# Altium PCB PCB2.PcbDoc
Units mil, origin at the board's own origin, x right, y up, seen from the top; angles counter-clockwise.
Board outline 3310 x 2450 mil, 2 copper layers (Top Layer, Bottom Layer); 28 components, 27 nets, 104 pads, 10 vias.
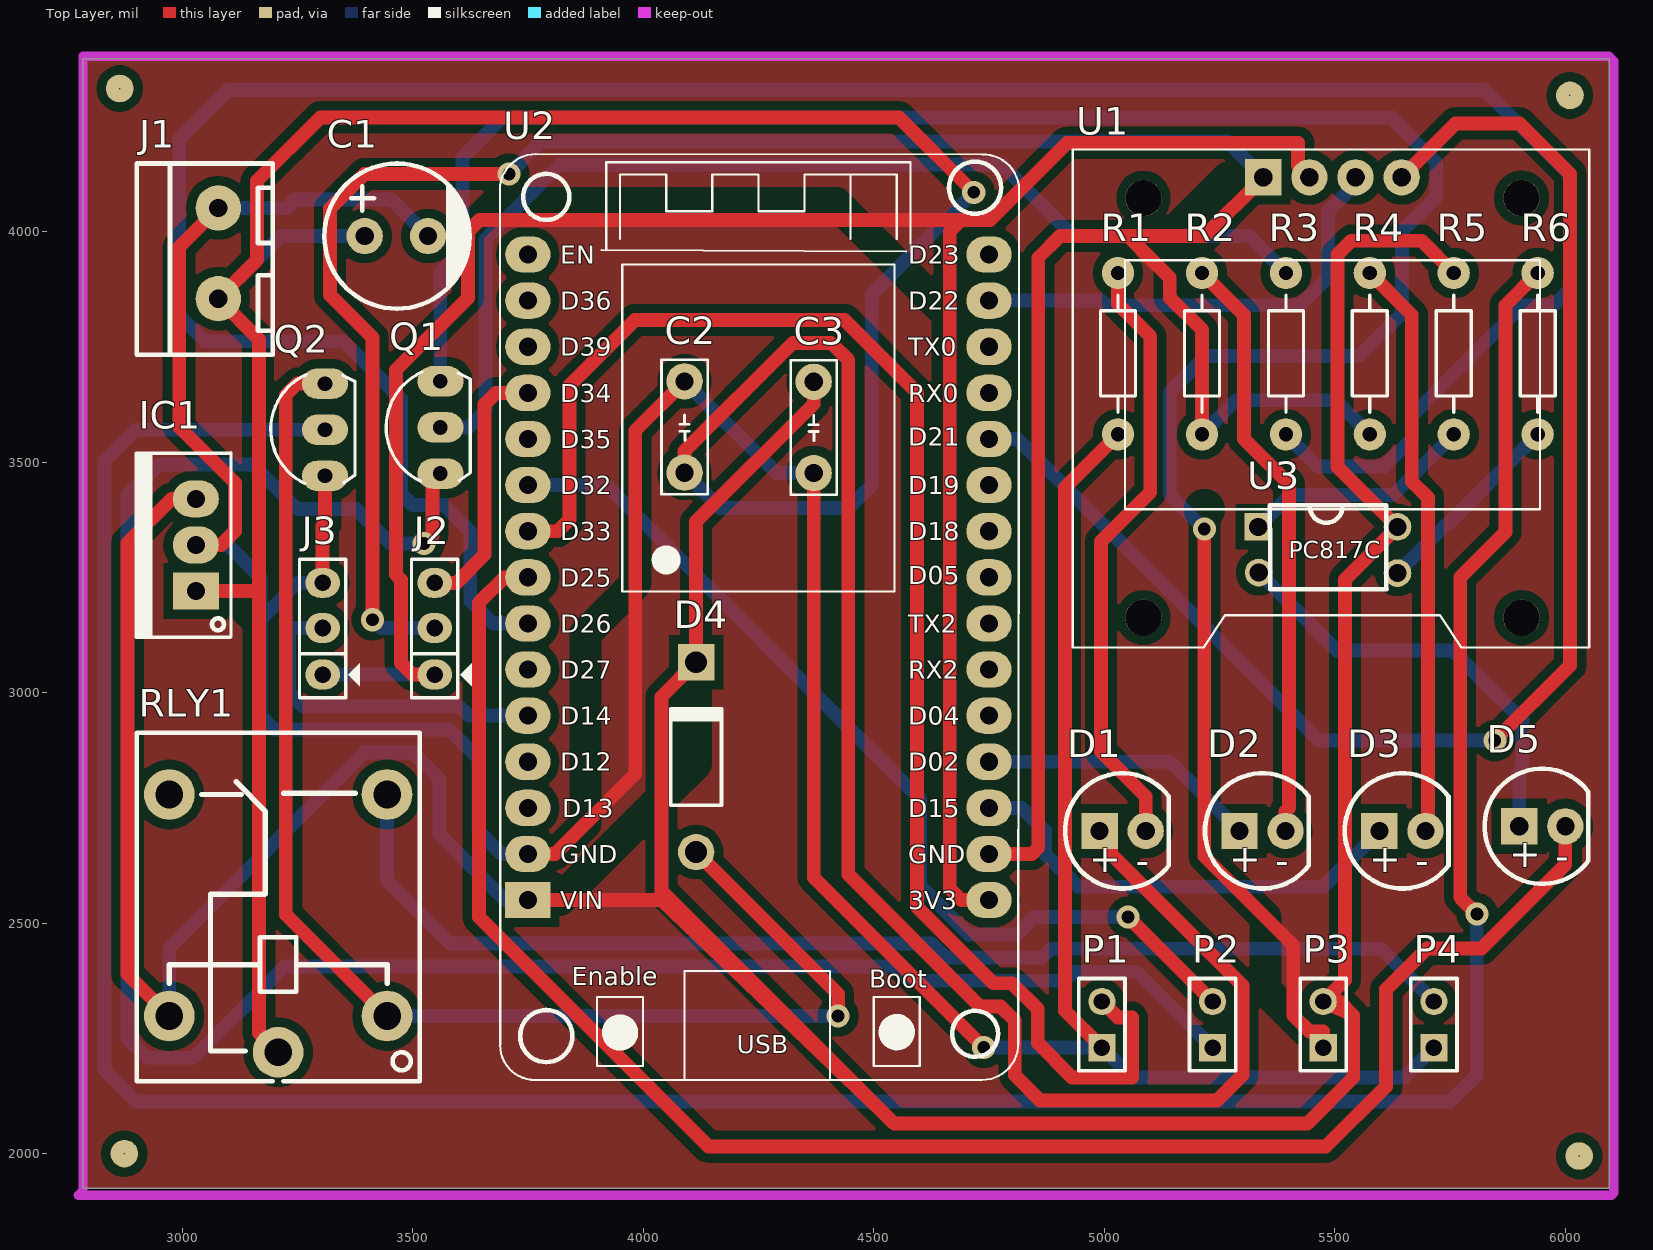
[diagram p0: Top Layer view]
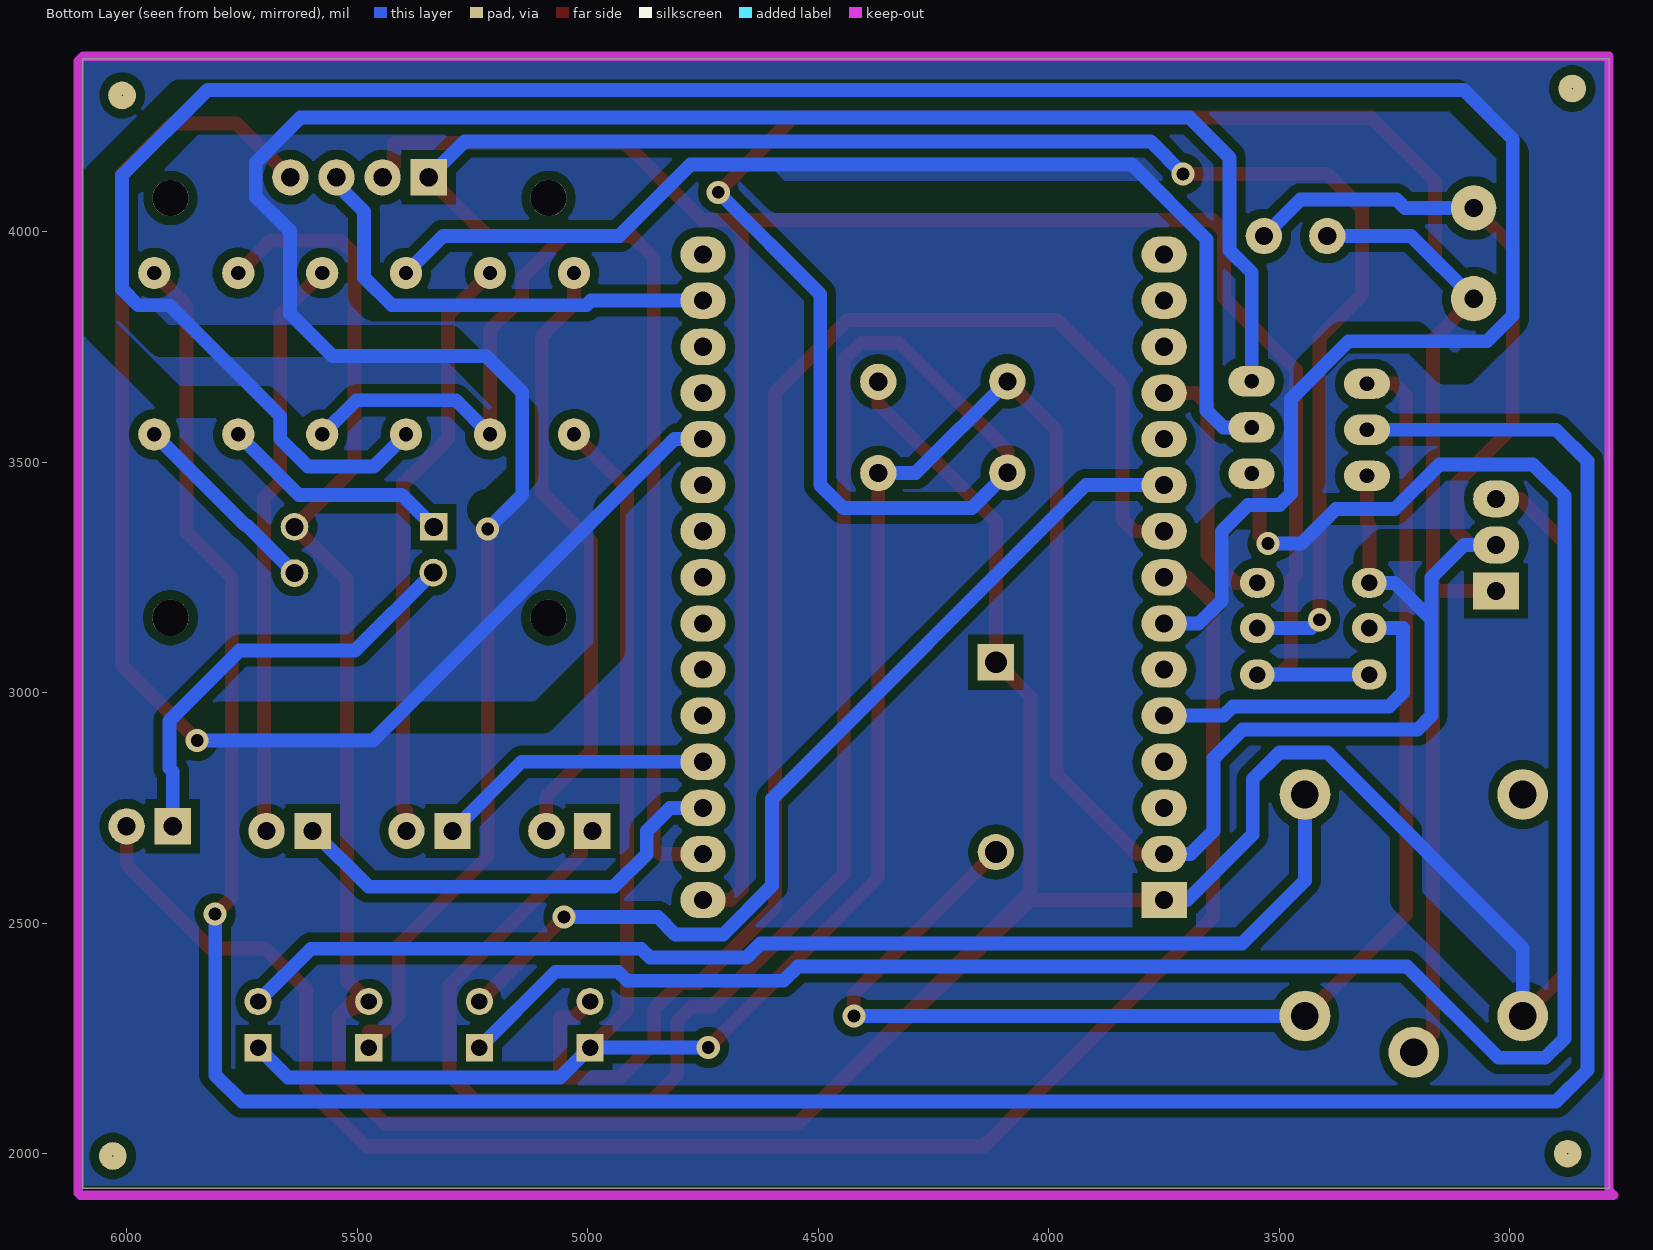
[diagram p1: Bottom Layer view, seen from below]
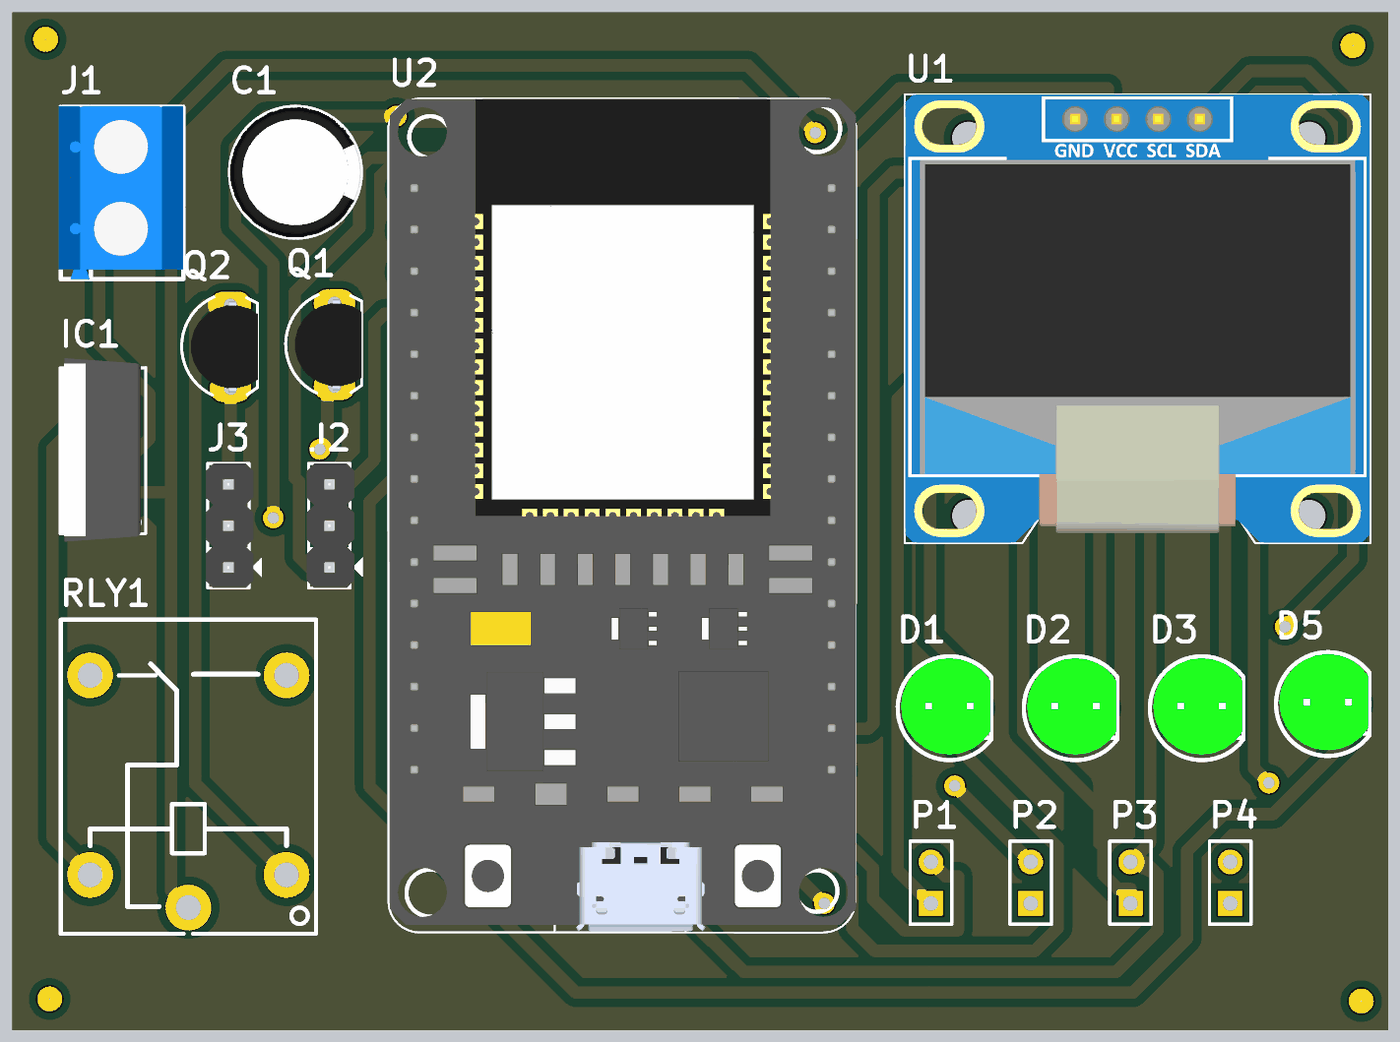
[diagram p2: 3D render of the assembled board from above, using the file's embedded part models]

## Layer stack, top to bottom
Top Solder: solder mask 0.4, Solder Resist, Dk 3.5
Top Layer: signal copper 1.4
Dielectric 1: dielectric 12.6, FR-4, Dk 4.8
Bottom Layer: signal copper 1.4
Bottom Solder: solder mask 0.4, Solder Resist, Dk 3.5

## Board outline
2785,1925 6095,1925 6095,4375 2785,4375

## Design rules (kind name [scope] priority, off if disabled: settings)
Clearance [All] p1: gap=20 ignorepadtopadclearanceinfootprint=FALSE
PolygonConnect [All] p1: connectstyle=Relief reliefconductorwidth=10 reliefentries=4 polygonreliefangle="90 Angle" airgapwidth=10
RoutingVias [All] p1: holewidth=28 width=50 viastyle="Through Hole" minholewidth=28 minwidth=50 maxholewidth=28 maxwidth=50
SolderMaskExpansion [All] p1: expansion=4 istentingtop=FALSE
Width [All] p1: maxlimit=40 minlimit=20 preferedwidth=30
30 further rules are at their usual default settings.

## Components (designator, comment, footprint, x,y, rotation, side; value= is the part's Value field where it differs from the comment)
C1 "100uF/50V" 100uF/50V 3465,3990.03 r0 top
C2 "CAPACITOR 103" "CAPACITOR 103" 4090,3575.95 r0 top
C3 "CAPACITOR 103" "CAPACITOR 103" 4370,3575 r0 top
D1 "LED_5mm_GREEN" LED_5mm_GREEN 5040,2700 r0 top
D2 "LED_5mm_GREEN" LED_5mm_GREEN 5343.33,2700 r0 top
D3 "LED_5mm_GREEN" LED_5mm_GREEN 5646.67,2700 r0 top
D4 "Diode 1N4007" DO-41 4115,2860 r90 top
D5 "LED_5mm_GREEN" LED_5mm_GREEN 5950,2710 r0 top
IC1 "LM7805" QTO-220 3030,3220 r90 top
J1 "Nguồn" BORNE-5.00-2P 3049,3940 r0 top
J2 "Cbdat" JP3 3547.78,3139 r90 top value=J3
J3 "DHT11" JP3 3305,3139 r90 top value=J3
P1 "nut 2" HDR1X2 4995,2230 r90 top
P2 "nut 1" HDR1X2 5235,2230 r90 top
P3 "Còi" HDR1X2 5475,2230 r90 top
P4 "Bơm" HDR1X2 5715,2230 r90 top
Q1 "BC547" QTO-92 3560.28,3575 r90 top value=C9014
Q2 "BC547" QTO-92 3310,3570 r90 top value=C9014
R1 "Res1" R1/4W 5030,3560 r90 top value=1K
R2 "Res1" R1/4W 5212,3560 r90 top value=1K
R3 "Res1" R1/4W 5394,3560 r90 top value=1K
R4 "Res1" R1/4W 5576,3560 r90 top value=1K
R5 "Res1" R1/4W 5758,3560 r90 top value=1K
R6 "Res1" R1/4W 5940,3560 r90 top value=1K
RLY1 "SRD-05VDC-SL-C" RELAY-TH_SRD-XXVDC-XL-C 3208.59,2535 r90 top
U1 "DISPLAY_OLED" DISPLAY_OLED 5495,3640 r0 top
U2 "ESP32_30" ESP32_30 4250,3250 r0 top
U3 "PC817C_DIP-4" PC817C_DIP-4 5485,3315 r0 top

## Footprints (in the part's own frame and the unit in brackets; to place one, negate y for a bottom-side part, rotate by r counter-clockwise, add the part's x,y. Pads: shape width x height; smd on the part's side, far side on the other; paste and mask are expansions set on the pad)
100uF/50V [mm] "ELECTROLYTIC CAPACITOR 8mm"
  round 2 hole 1 paste+0 mask+0.1: 1(1.745,0) 2(-1.745,0)
  silkscreen extent -3.97,-4 4.03,4, body extent -3.97,-4 4.03,4, height 12
BORNE-5.00-2P [mm]
  round 2.5 hole 1: 1(0.754,2.821) 2(0.754,-2.18)
  silkscreen extent -3.75,-5.27 3.75,5.27, body extent -3.86,-5.28 3.74,5.32, height 10.1
"CAPACITOR 103" [mm]
  round 2 hole 1: 1(0,-2.516) 2(0,2.516)
  silkscreen extent -1.27,-3.71 1.27,3.71, body extent -1.2,-2.93 1.25,2.72, height 5.3
DISPLAY_OLED [mm]
  rect 2x2 hole 1: 1(-3.81,12.128)
  round 2 hole 1: 2(-1.27,12.128) 3(1.27,12.128) 4(3.81,12.128)
  round 2 hole 2 unplated: ""(-10.414,-12.128) ""(-10.414,10.986) ""(10.414,-12.128) ""(10.414,10.986)
  silkscreen extent -14.3,-13.78 14.15,13.66, body extent -14.28,-13.76 14.12,13.64, height 5.7
DO-41 [mm] "Diode, Axial; Body 5.2 x 2.7 mm (LxDia. max), Lead Dia. 0.86 mm (max)"
  round 2 hole 1.2: 1(-5.23,0)
  rect 2x2 hole 1.2: 2(5.23,0)
  silkscreen extent -2.65,-1.4 2.75,1.4
ESP32_30 [mm] "Microcontoller Board 30 Pins Wifi 2.4GHz BLE 4.2 ESP32-WROOM-32D"
  oval 2.5x2 hole 1: 1(-12.7,17.78) 2(-12.7,15.24) 3(-12.7,12.7) 4(-12.7,10.16) 5(-12.7,7.62) 6(-12.7,5.08) 7(-12.7,2.54) 8(-12.7,0) 9(-12.7,-2.54) 10(-12.7,-5.08) 11(-12.7,-7.62) 12(-12.7,-10.16) 13(-12.7,-12.7) 14(-12.7,-15.24) 16(12.7,17.78) 17(12.7,15.24) 18(12.7,12.7) 19(12.7,10.16) 20(12.7,7.62) 21(12.7,5.08) 22(12.7,2.54) 23(12.7,0) 24(12.7,-2.54) 25(12.7,-5.08) 26(12.7,-7.62) 27(12.7,-10.16) 28(12.7,-12.7) 29(12.7,-15.24) 30(12.7,-17.78)
  rect 2.5x2 hole 1: 15(-12.7,-17.78)
  silkscreen extent -14.23,-27.69 14.35,23.31, body extent -14.15,-27.61 14.35,23.29, height 7
HDR1X2 [mm] "Connector; Header; 2 Position"
  rect 1.5x1.5 hole 0.9: 1(0,0)
  round 1.5 hole 0.9: 2(2.54,0)
  silkscreen extent -1.27,-1.27 3.81,1.27
JP3 [mil] "Jumper 3"
  oval 65x75 hole 36: 1(-100,0) 2(1,0) 3(99,0)
  silkscreen extent -150,-81 150,50, body extent -150,-60 150,55, height 355
LED_5mm_GREEN [mm]
  rect 2x2 hole 1: 1(-1.27,0)
  round 2 hole 1: 2(1.27,0)
  silkscreen extent -3.17,-3.17 2.54,3.17, body extent -2.97,-2.83 2.48,3.07, height 8.65
PC817C_DIP-4 [mil]
  rect 60x60 hole 39.37 paste+0 mask+4: 1(-151.04,44.42)
  round 60 hole 39.37 paste+0 mask+4: 2(-149.86,-54.7) 3(151.04,-55.88) 4(151.04,44.42)
  silkscreen extent -126,-91 127,91
QTO-92 [mil] "TO-92"
  oval 66x100 hole 32: 1(-100,0) 2(0,0) 3(100,0)
  silkscreen extent -117,-65 120,118, body extent -109,-66 109,95, height 245
QTO-220 [mil] "TO-220 - 1-2-3"
  rect 80x100 hole 39: 1(0,0)
  oval 80x100 hole 39: 2(100,0) 3(200,0)
  silkscreen extent -100,-76 300,130, body extent -119,-64 322,121, height 755
R1/4W [mil] "R 1/4W, 2 Pin, 350mil"
  round 70 hole 31: 1(0,0) 2(350,0)
  silkscreen extent 48,-38 302,38, body extent -40,-47 386,47, height 111
RELAY-TH_SRD-XXVDC-XL-C [mil]
  round 110 hole 60 paste+0 mask+2: 1(-236.26,-236.22) 2(244.05,-236.2) 3(244.06,236.2) 4(-236.26,236.22) 5(-315,0)
  silkscreen extent -378,-307 378,307

## Part data
C1: "Electrolytic Capacitor 100uF/50V"
C2 C3: "Ceramic Capacitor 103, 5mm."
D1 D2 D3 D5: "LED PTH 5mm Green."
D4: "1 Amp General Purpose Rectifier", Code_JEDEC=DO-204-AL, ComponentLink1Description="Manufacturer Link", ComponentLink1URL=http://www.fairchildsemi.com/, ComponentLink2Description=Datasheet, ComponentLink2URL=http://www.fairchildsemi.com/ds/1N%2F1N4001.pdf, DatasheetVersion=1998, LatestRevisionDate=17-Jul-2002, LatestRevisionNote="Re-released for DXP Platform.", PackageDescription="Diode, Axial; Body 5.2 x 2.7 mm (LxDia. max), Lead Dia. 0.86 mm (max)", PackageReference=DO-41, PackageVersion=Aug-1999, Published=8-Jun-2000, Publisher="Altium Limited"
IC1: library part LM78xx, "On ap +, from + 5 to + 24VDC"
J1: library part BORNE-5.00-2P, "Borne 2 Vias, Pitch 5mm.", JLCPCB PN=C91153
J2 J3: library part JP3, "Jumper 3"
P1 P2 P3 P4: library part "Header 2", "Header, 2-Pin", LatestRevisionDate=17-Jul-2002, LatestRevisionNote="Re-released for DXP Platform.", Publisher="Altium Limited"
Q1 Q2: library part NPN_EBC, "P 600mW, EBC"
R1 R2 R3 R4 R5 R6: library part Res1_4, "Resistor", Manufacturer="Generic Components", Class=Passive, Published=08/06/2000, Publisher="Altium Hobart Technology Centre", SubClass=Resistor
U1: "Display Oled 128x64 0.96\" I2C."
U2: "Microcontoller Board 30 Pins Wifi 2.4GHz BLE 4.2 ESP32-WROOM-32D", ComponentLink1Description=Datasheet, ComponentLink1URL=https://www.mouser.com/datasheet/2/891/esp32_wroom_32d_esp32_wroom_32u_datasheet_en-1365844.pdf

## Free pads (board coordinates)
  round 60 hole 3.2: 10(2865,4310) 11(6010,4295) 12(6030,1995) 13(2875,2000)

## Via types
v1: diameter 50, hole 28, Top Layer to Bottom Layer, 10 vias

## Nets (pads, with @x,y where several pads share a name; then routed paths per layer and width w, separated by ;. In a path a pad name is that pad's centre, name@x,y a point inside that pad or via, vN(x,y) a via of type N, cw(c..) or ccw(c..) an arc to the next point about the centre after c; other vN are vias at no path point)
5V: C3.2 D4.2 IC1.3 P3.2 R5.2 RLY1.4 U2.15 U3.4 | length 8853.1
  Top Layer w30: RLY1.4 2882,2389.11 2882,3325 2977,3420 IC1.3 ; U2.15 4040,2550 4544.53,2065.47 ; C3.2 4370,3626 4115,3371 D4.2 4040,2990.91 4040,2570 4544.53,2065.47 ; R5.2 5688,3980 5536,3980 5506,3950 5506,3489.46 U3.4 5522,3245.38 5522,2377 P3.2 ; 4544.53,2065.47 5440.47,2065.47 5540,2165 5540,2300 ; P3.2 5540,2300 ; P3.2 5510,2330 5540,2300
  Bottom Layer w30: RLY1.4 2972.37,2446.37 3396,2870 3500,2870 3558,2812 3558,2692 3700,2550 U2.15
12V: C1.2 C2.1 D1.1 IC1.1 J1.2 RLY1.5 | length 8789.8
  Top Layer w30: IC1.1 3167,3220 ; RLY1.5 3167,2261.59 3167,3220 ; C2.1 4090,3523.49 4324.51,3758 4408,3758 4445,3721 4445,2605.5 4730.94,2319.56 4775,2319.56 4806,2288.56 4806,2170.33 4860.86,2115.47 5244.47,2115.47 5300,2171 5300,2365 5015,2650 5015,2675 D1.1 ; v1(4717,4085) 4555,4247 3300,4247 3163,4110 3163,3938.53 J1.2 3167,3765.86 3167,3220
  Bottom Layer w30: J1.2 3214.5,3990.03 C1.2 ; C2.1 4166.9,3400 4446,3400 4496,3450 4496,3864 v1(4717,4085)
GND: C1.1 C2.2 C3.1 IC1.2 J1.1 J3.3 P1.1 P4.1 Q2.1 R1.1 U2.14 | length 8448.7
  Top Layer w30: IC1.2 3085,3320 3115,3350 3115,3455 2994,3576 2994,3966.38 J1.1 ; J3.3 3305,3361 3310,3366 Q2.1 ; U2.14 3809,2650 3983,2824 3983,3568 C2.2 ; C3.1 4370,2598.68 v1(4738.68,2230) ; P1.1 4915,2310 4915,3445 R1.1
  Bottom Layer w30: IC1.2 3100,3320 3170,3250 3170,3158 ; J1.1 3228,4051.04 3245.96,4069 3454.73,4069 C1.1 ; J3.3 3250,3238 3170,3158 ; U2.14 3693,2650 3643,2700 3643,2857 3580,2920 3200,2920 3170,2950 3170,3158 ; C2.2 4289.05,3475.95 C3.1 ; v1(4738.68,2230) P1.1 5060,2165 5650,2165 P4.1
NetD1_2: D1.2 R1.2 | length 1323.5
  Top Layer w30: R1.2 5030,3842.4 5100,3772.4 5100,3435 4993,3328 4993,2872 5090,2775 D1.2
NetD2_1: D2.1 U2.27 | length 605.5
  Bottom Layer w30: U2.27 5143.33,2850 D2.1
NetD2_2: D2.2 R2.2 | length 1291.5
  Top Layer w30: R2.2 5303,3819 5303,3550 5401,3452 5401,2750 5393.33,2742.33 D2.2
NetD3_1: D3.1 U2.28 | length 996.9
  Bottom Layer w30: U2.28 4822,2750 4872,2700 4872,2650 4943,2579 5475.67,2579 D3.1
NetD3_2: D3.2 R4.2 | length 1264.4
  Top Layer w30: R4.2 5667,3819 5667,3458 5702,3423 5702,2705.33 D3.2
NetD4_1: D4.1 Q2.3 RLY1.1 | length 2993.9
  Top Layer w30: Q2.3 3250,3670 3225,3645 3225,2518.55 RLY1.1 ; D4.1 4423.09,2346 v1(4423.09,2298.74)
  Bottom Layer w30: RLY1.1 v1(4423.09,2298.74)
NetD5_1: D5.1 U3.2 | length 936.8
  Bottom Layer w30: U3.2 5504.44,3091 5755,3091 5907,2939 5907,2836 5900,2829 D5.1
NetD5_2: D5.2 U2.8 | length 3832.2
  Top Layer w30: U2.8 3699,3250 3644,3195 3644,2513 4141.53,2015.47 5480.47,2015.47 5611,2146 5611,2356 5700,2445 5818,2445 6000,2627 D5.2
NetJ2_1: J2.1 J3.1 U1.2 U2.30 | length 4851.1
  Top Layer w30: J2.1 3500,3039 3475,3064 3475,3244.61 3464.11,3255.5 3464.11,3700.11 3620,3856 3620,4000 3645,4025 4690,4025 ; U2.30 4690,2550 4665,2575 4665,4000 4690,4025 ; U1.2 5420,4142.5 5420,4192 4919.02,4192 4752.02,4025 4690,4025
  Bottom Layer w30: J3.1 J2.1
NetJ2_2: J2.2 R2.1 R4.1 U1.1 U2.29 | length 6062.2
  Top Layer w30: v1(3413,3158) 3413,3770 3321,3862 3321,4050 3396,4125 v1(3709,4125) ; U2.29 4843,2650 4857,2664 4857,3943 4904,3990 5052,3990 ; R2.1 5212,3787 5142,3857 5142,3900 5052,3990 ; U1.1 5217.5,3990 5052,3990
  Bottom Layer w30: v1(3413,3158) 3431,3140 J2.2 ; v1(3709,4125) 3779,4195 5267.5,4195 U1.1 ; R2.1 5286,3634 5502,3634 R4.1
NetJ2_3: J2.3 U2.4 | length 563.8
  Top Layer w30: J2.3 3595,3238 3656,3299 3656,3625 3681,3650 U2.4
NetJ3_2: J3.2 U2.11 | length 751.7
  Bottom Layer w30: J3.2 3232,3140 3232,3000 3262,2970 3601,2970 3621,2950 U2.11
NetP1_2: P1.2 U2.7 | length 3256.4
  Top Layer w30: U2.7 3815,3350 3840,3375 3840,3666 3982,3808 4437,3808 4594.3,3650.7 4594.3,2534.7 4759.44,2369.56 4800,2369.56 4856,2313.56 4856,2239.94 4930.47,2165.47 5060,2165.47 5060,2295 5030,2295 P1.2
NetP2_1: P2.1 Q1.1 | length 4637.8
  Top Layer w30: v1(3525,3323) 3543,3341 3543,3475 Q1.1
  Bottom Layer w30: v1(3525,3323) 3452.22,3323 3377.22,3398 3250,3398 3153,3495 2950,3495 2882,3427 2882,2250 2924,2208 3025,2208 3223.16,2406.16 4544.55,2406.16 4575.71,2375 4914.47,2375 4934,2394.53 5070.47,2394.53 P2.1
NetP2_2: P2.2 U2.6 | length 2090.1
  Top Layer w30: v1(5052,2513) P2.2
  Bottom Layer w30: U2.6 3920,3450 4600.63,2769.37 4600.63,2581.24 4706.24,2475.63 4810.39,2475.63 4847.76,2513 v1(5052,2513)
NetP3_1: P3.1 Q1.3 | length 5203.3
  Top Layer w30: v1(5217,3355) 5217,2645 5410,2452 5410,2300 5445,2265 5475,2265 P3.1
  Bottom Layer w30: Q1.3 3560,3675 3560,3911 3608.07,3959.07 3608.07,4160 3695.07,4247 5623,4247 5720,4150 5720,4075 5646,4001 5646,3822 5554,3730 5221,3730 5142,3651 5142,3430 v1(5217,3355)
NetP4_2: P4.2 RLY1.2 | length 2581.3
  Bottom Layer w30: RLY1.2 3444.79,2592.21 3580.84,2456.16 4625.71,2456.16 4656.24,2425.63 4865.31,2425.63 4884.21,2444.53 5600.47,2444.53 P4.2
NetQ1_2: Q1.2 R3.2 | length 2384.5
  Bottom Layer w30: Q1.2 3621,3575 3658.07,3612.07 3658.07,3983.07 3820,4145 4777.02,4145 4932.02,3990 5314,3990 R3.2
NetQ2_2: Q2.2 R6.2 | length 6678.9
  Top Layer w30: v1(5808,2520) 5772,2556 5772,3250 5870,3348 5870,3840 R6.2
  Bottom Layer w30: Q2.2 2900,3570 2832,3502 2832,2181 2900,2113 5750,2113 5808,2171 v1(5808,2520)
NetR3_1: R3.1 U2.9 | length 5840.9
  Bottom Layer w30: U2.9 3675,3150 3625,3200 3625,3350 3568,3407 3500,3407 3475,3432 3475,3637 3350,3762 3050,3762 2994,3818 2994,4201 3100,4307 5825,4307 6010,4122 6010,3875 5975,3840 5907,3840 5667,3600 5667,3550 5607,3490 5464,3490 R3.1
NetR5_1: R5.1 U3.1 | length 507.1
  Bottom Layer w30: U3.1 5403.31,3428.77 5626.77,3428.77 R5.1
NetR6_1: R6.1 U3.3 | length 428.6
  Bottom Layer w30: U3.3 5739.92,3363 5743,3363 R6.1
NetU1_3: U1.3 U2.17 | length 1006.3
  Bottom Layer w30: U2.17 4993,3850 5003,3840 5425,3840 5485,3900 5485,4043 5545,4103 U1.3
NetU1_4: U1.4 U2.20 | length 3122.8
  Top Layer w30: U1.4 5761.5,4234 5901,4234 6010,4125 6010,3059 v1(5847,2896)
  Bottom Layer w30: U2.20 4812,3550 5466,2896 v1(5847,2896)
pads on no net: RLY1.3 U1. U2.1 U2.2 U2.3 U2.5 U2.10 U2.12 U2.13 U2.16 U2.18 U2.19 U2.21 U2.22 U2.23 U2.24 U2.25 U2.26

## Polygon pours and split planes (outlines as drawn)
no net on Bottom Layer "NONET_L02_P000" (solid, pour order 0): 2785,4375 6095,4375 6095,1925 6090,1930 2785,1930
no net on Top Layer "NONET_L01_P001" (solid, pour order 1): 2785,4375 6095,4375 6095,1925 2785,1925

## Keep-outs
Keep-Out Layer:
  lines w20: 2775,1910 2785,1920 2785,4380 6095,4380 6105,4370 6105,1915 6100,1910 2775,1910

## Text inside footprints (layer, text, board x,y; h text height)
D1: Top Overlay "+" at 4968.08,2610.79 h60; Top Overlay "-" at 5068.08,2605.79 h60
D2: Top Overlay "+" at 5271.41,2610.79 h60; Top Overlay "-" at 5371.41,2605.79 h60
D3: Top Overlay "+" at 5574.74,2610.79 h60; Top Overlay "-" at 5674.74,2605.79 h60
D5: Top Overlay "+" at 5878.08,2620.79 h60; Top Overlay "-" at 5978.08,2615.79 h60
U2: Top Overlay "Enable" at 3845,2365 h39.37; Top Overlay "Boot" at 4490,2360 h39.37; Top Overlay "USB" at 4202.77,2218.1 h39.37; Top Overlay "EN" at 3820,3930 h39.37; Top Overlay "D23" at 4575,3930 h39.37; Top Overlay "D36" at 3820,3830 h39.37; Top Overlay "TX2" at 4575,3130 h39.37; Top Overlay "RX2" at 4575,3030 h39.37; Top Overlay "D15" at 4575,2730 h39.37; Top Overlay "D02" at 4575,2830 h39.37; Top Overlay "GND" at 4575,2630 h39.37; Top Overlay "D04" at 4575,2930 h39.37; Top Overlay "3V3" at 4575,2530 h39.37; Top Overlay "D39" at 3820,3730 h39.37; Top Overlay "D12" at 3820,2830 h39.37; Top Overlay "VIN" at 3820,2530 h39.37; Top Overlay "GND" at 3820,2630 h39.37; Top Overlay "D14" at 3820,2930 h39.37; Top Overlay "D27" at 3820,3030 h39.37; Top Overlay "D13" at 3825,2730 h39.37; Top Overlay "D26" at 3820,3130 h39.37; Top Overlay "D32" at 3820,3430 h39.37; Top Overlay "D34" at 3820,3630 h39.37; Top Overlay "D35" at 3820,3530 h39.37; Top Overlay "D33" at 3820,3330 h39.37; Top Overlay "D25" at 3820,3230 h39.37; Top Overlay "D19" at 4575,3430 h39.37; Top Overlay "D05" at 4575,3235 h39.37; Top Overlay "D18" at 4575,3330 h39.37; Top Overlay "D21" at 4575,3535 h39.37; Top Overlay "D22" at 4575,3830 h39.37; Top Overlay "TX0" at 4575,3730 h39.37; Top Overlay "RX0" at 4575,3630 h39.37
U3: Top Overlay "PC817C" at 5400.04,3291.16 h37.4